# EAGLE board mikrophonie_2_r2 (EAGLE 6.5.0)
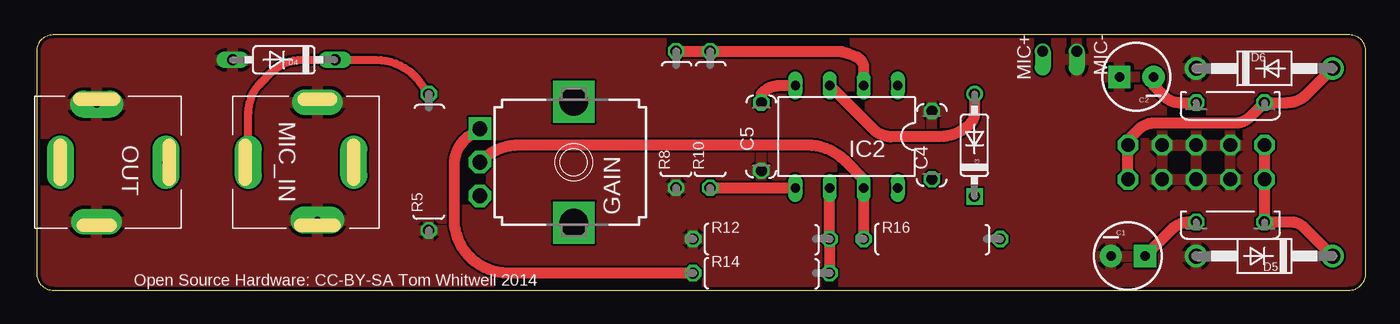
[diagram p0: board, top side]
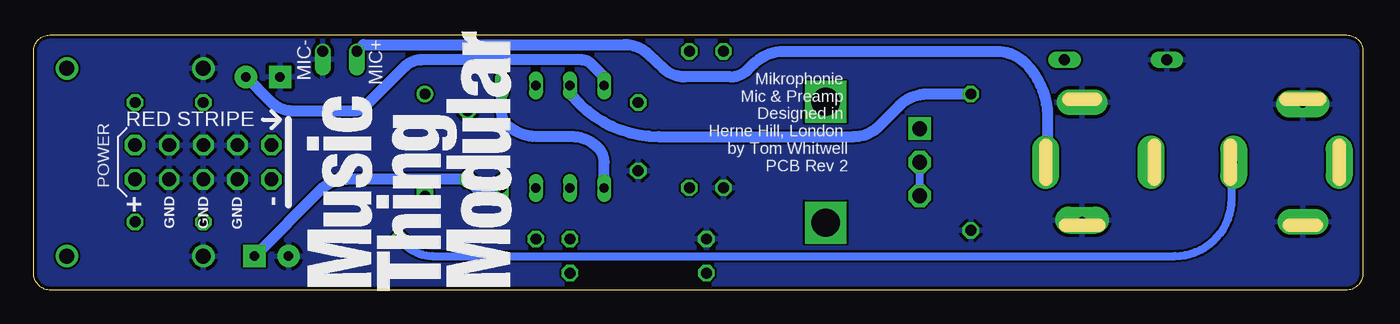
[diagram p1: board, bottom side, seen from below]

Size 99 x 19 mm. Coordinates in mm from the lower left corner, seen from the top.
Outline: 0,17.78 0,1.27 arc90 1.27,0 97.73,0 arc90 99,1.27 99,17.79 arc90 97.79,19 1.22,19 arc90 0,17.78
Copper layers (1*2*15*16): Top 0.035mm / dielectric 0.2mm / Route2 0.0175mm / dielectric 1.1mm / Route15 0.0175mm / dielectric 0.2mm / Bottom 0.035mm
Design rules "SeeedStudio_DRU_no_angle_20130527": minimum track width 6mil, minimum drill 12mil, track to track 6mil, track to pad 6mil, pad to pad 6mil, via to via 6mil, smd to smd 0mil, copper to edge 10mil, drill to drill 10mil, minimum pad ring 6mil, minimum via ring 6mil, stop-mask expansion 2mil, vias tented up to drill 25mil, thermal gap 10mil
Net classes: 0 default: width 0.61 mm; 1 power: width 0.61 mm; 2 ground: width 0.61 mm

## Footprints (pad centres in the part's own frame; a part is rotated, then mirrored left to right if it is on the bottom)
C050H075X075 = drill 0.813 octagon: 1 -2.54,0; 2 2.54,0
CPOL-RADIAL-10UF-25V = drill 0.7 pad 1.651 square: 1 1.27,0 | drill 0.7 pad 1.651: 2 -1.27,0
C050-024X044 = drill 0.813 octagon: 1 -2.54,0; 2 2.54,0
DO35-7 = drill 0.813: A 3.81,0 | drill 0.813 square: C -3.81,0
DO35-7' = drill 0.813 long: A 3.81,0; C -3.81,0
DO41-10 = drill 1.118: A 5.08,0; C -5.08,0
EVUF = drill 1.1 pad 1.676 square: 1 -2.5,-7 | drill 1.1 pad 1.676 octagon: 2 0,-7; 3 2.5,-7 | drill 2.1 pad 2.8 square: M1 4.5,0; M2 -4.5,0
DIL08 = drill 0.7 long: 1 -3.81,-3.81; 2 -1.27,-3.81; 3 1.27,-3.81; 4 3.81,-3.81; 5 3.81,3.81; 6 1.27,3.81; 7 -1.27,3.81; 8 -3.81,3.81
LONG_PAD_1 = drill 0.8 offset: P$1 0,0
ERTHENVAR_SLIMLINE = drill 0.5 pad 2 long: GND1 -4.319,-0.6; SWITCH 0,-3.3; TIP 0,4.546 | drill 0.5 pad 1.9 long: GND2 4.446,-0.6
0207/10 = drill 0.813 octagon: 1 -5.08,0; 2 5.08,0
MA05-2 = drill 1.016 octagon: 1 -5.08,-1.27; 2 -5.08,1.27; 3 -2.54,-1.27; 4 -2.54,1.27; 5 0,-1.27; 6 0,1.27; 7 2.54,-1.27; 8 2.54,1.27; 9 5.08,-1.27; 10 5.08,1.27

## Placement (x,y rotation side)
1  FUSE  [C050H075X075]  88.9,5.08 180 top
C1  10uf  [CPOL-RADIAL-10UF-25V]  81.28,2.54 0 top
C2  10uf  [CPOL-RADIAL-10UF-25V]  81.92,15.88 180 top
C4  100n  [C050-024X044]  66.67,10.79 90 top
C5  100n  [C050-024X044]  53.98,11.43 90 top
D3  1N4148  [DO35-7]  69.85,10.79 90 top
D4  1N4148  [DO35-7']  18.41,17.14 180 top
D5  1N4001  [DO41-10]  91.44,2.54 180 top
D6  1N4001  [DO41-10]  91.44,16.51 0 top
FUSE  FUSE  [C050H075X075]  88.9,13.97 180 top
GAIN  50k  [EVUF]  40.01,9.53 270 top
IC2  TL072  [DIL08]  60.33,11.43 180 top
MIC+  MIC+  [LONG_PAD_1]  74.93,17.78 270 top
MIC-  MIC-  [LONG_PAD_1]  77.47,17.78 270 top
MIC_IN  ERTHENVAR_SLIMLINE  [ERTHENVAR_SLIMLINE]  20.32,9.53 90 top
OUT  ERTHENVAR_SLIMLINE  [ERTHENVAR_SLIMLINE]  5.08,9.53 270 top
R5  1m  [0207/10]  29.21,9.53 90 top
R8  10k  [0207/10]  47.62,12.7 90 top
R10  56k  [0207/10]  50.16,12.7 90 top
R12  2.2k  [0207/10]  53.98,3.81 0 top
R14  2.2k  [0207/10]  53.98,1.27 0 top
R16  220R  [0207/10]  66.67,3.81 0 top
SV1  [MA05-2]  86.36,9.53 180 bottom
U$2  [MTM_2CM_SCREEN_200DPI]  63.5,0.25 90 bottom

## Library data of the parts
1 C4 C5 D3 FUSE GAIN IC2 MIC+ MIC- MIC_IN OUT R5 R8 R10 R12 R14 R16 = TomW
C1 C2 = SparkFun-Passives
D4-D6 = diode
SV1 = TomW; OC_FARNELL: unknown; OC_NEWARK: unknown
U$2 = TW_logos

## Nets
+12V [power]: 1.2 C1.1 C4.1 D3.C IC2.8
+12V_INLET: 1.1 D5.C SV1.9 SV1.10
-12V [power]: C2.2 C5.2 FUSE.2 IC2.4
-12V_INLET: D6.A FUSE.1 SV1.1 SV1.2
GND [ground]: C1.2 C2.1 C4.2 C5.1 D4.A D5.A D6.C MIC-.P$1 MIC_IN.GND1 MIC_IN.GND2 OUT.GND1 OUT.GND2 R5.1 R8.1 R12.1 SV1.3 SV1.4 SV1.5 SV1.6 SV1.7 SV1.8
N$1: MIC+.P$1 MIC_IN.SWITCH
N$2: D3.A D4.C IC2.3 MIC_IN.TIP R5.2
N$3: IC2.2 R8.2 R10.2
N$4: IC2.1 IC2.5 R10.1
N$5: GAIN.1 R14.1
N$6: IC2.6 R12.2 R14.2
N$8: GAIN.2 GAIN.3 IC2.7 R16.1
N$10: OUT.TIP R16.2

## Tracks (layer width: path | path; a pad name or v marks a point on that pad's centre or on a via)
+12V
  Top 0.61: 1.2 85.92,5.08
  Top 0.813: 85.92,5.08 arc45 84.5,4.49 C1.1
  Bottom 0.61: D3.C 69.85,8.26
  Bottom 0.813: IC2.8 66.04,7.62 C4.1 69.85,8.26 75.72,8.26 arc-45 77.62,7.47 C1.1
+12V_INLET
  Top 0.813: D5.C 94.4,4.66 arc45 93.39,5.08 1.1 SV1.10 SV1.9
-12V
  Top 0.813: C2.2 83.19,15.24 84.04,14.39 arc45 85.04,13.97 FUSE.2 | C5.2 53.98,14.61 54.08,14.71 arc-45 55.35,15.24 IC2.4
  Bottom 0.813: C2.2 81.32,14.01 arc-45 79.7,13.34 75.2,13.34 arc-45 74.28,13.71 71.36,16.63 arc45 70.12,17.14 58.16,17.14 arc45 57.52,16.88 56.7,16.06 arc45 56.52,15.61 IC2.4
-12V_INLET
  Top 0.61: SV1.1 81.28,11.18
  Top 0.813: SV1.2 SV1.1 | 81.28,11.18 82.07,11.97 arc-45 83.22,12.45 89.27,12.45 arc45 90.38,12.91 FUSE.1 93.15,13.97 arc45 94.57,14.56 D6.A
GND
  pour Bottom: 0,21.91 -1.27,-1.27 101.71,-1.27 101.71,20.64
  pour Top: -0.64,20.32 101.6,20.32 101.6,-3.17 -1.27,-3.17 -1.27,20.95
N$1
  Bottom 0.61: 23.5,9.65 MIC_IN.SWITCH
  Bottom 0.813: 23.5,9.65 23.5,12.89 arc-45 25.16,16.9 arc-45 27.27,17.78 43.13,17.78 arc-45 45.38,16.85 45.83,16.4 arc45 47.1,15.88 50.52,15.88 arc44 52.1,16.5 53.22,17.57 arc-44 55.02,18.29 74.42,18.29 MIC+.P$1
N$2
  Top 0.61: MIC_IN.TIP 15.77,13.18 arc-45 16.71,15.44 17.48,16.21 arc-45 19.73,17.14 D4.C 25.27,17.14 arc-53 28.52,15.52 R5.2
  Top 0.813: IC2.3 62.28,12.02 arc45 63.7,11.43 67.27,11.43 arc45 69.51,12.36 arc45 69.85,13.18 D3.A
  Bottom 0.813: IC2.3 59.05,14.61 58.3,13.86 arc-45 52.45,11.43 37.91,11.43 arc-45 36.06,12.2 34.49,13.77 arc45 32.48,14.61 R5.2
N$3
  Top 0.813: R8.2 R10.2 59.55,17.78 arc-23 60.53,17.59 61.04,17.38 arc-67 61.59,16.55 IC2.2
N$4
  Top 0.813: R10.1 IC2.5
  Bottom 0.813: IC2.5 56.52,9.54 arc-45 56.95,10.6 arc-45 58.96,11.43 61.55,11.43 arc45 63.8,12.36 arc45 64.14,13.18 IC2.1
N$5
  Top 0.813: R14.1 35.13,1.27 arc-90 31.11,5.29 31.11,9.33 arc-56 32.28,11.53 GAIN.1
N$6
  Top 0.813: IC2.6 R12.2 R14.2
N$8
  Top 0.813: R16.1 IC2.7 61.59,8.26 60.23,9.62 arc45 57.39,10.79 35.96,10.79 arc45 33.08,9.6 GAIN.2
  Bottom 0.61: GAIN.3 GAIN.2
N$10
  Bottom 0.61: R16.2 71.32,3.37 arc-45 69.31,2.54 14.02,2.54 arc-90 9.78,6.78 9.78,9.37 OUT.TIP 9.65,9.5

## Text on the board
tPlace: Open Source Hardware: CC-BY-SA Tom Whitwell 2014
bPlace: Mikrophonie / Mic & Preamp / Designed in / Herne Hill, London / by Tom Whitwell / PCB Rev 2
bStop: Inspired by: | John Cage | Nicholas Collins | David Tudor | Alvin Lucier | Robert Ashley | GetLoFi | Ben / Burtt | Gordon / Mumma | Schaeffer / & Henry | Stockhausen | Justice / Yeldham | The Muff / Wigglers | Richard Lehrman | Leafcutter John | Don Tillman | Colin Cunningham